# Altium PCB board.PcbDoc
Units mm, origin at the board's own origin, x right, y up, seen from the top; angles counter-clockwise.
Board outline 44.58 x 25.65 mm, 2 copper layers (Top Layer, Bottom Layer); 41 components, 20 nets, 114 pads, 87 vias.
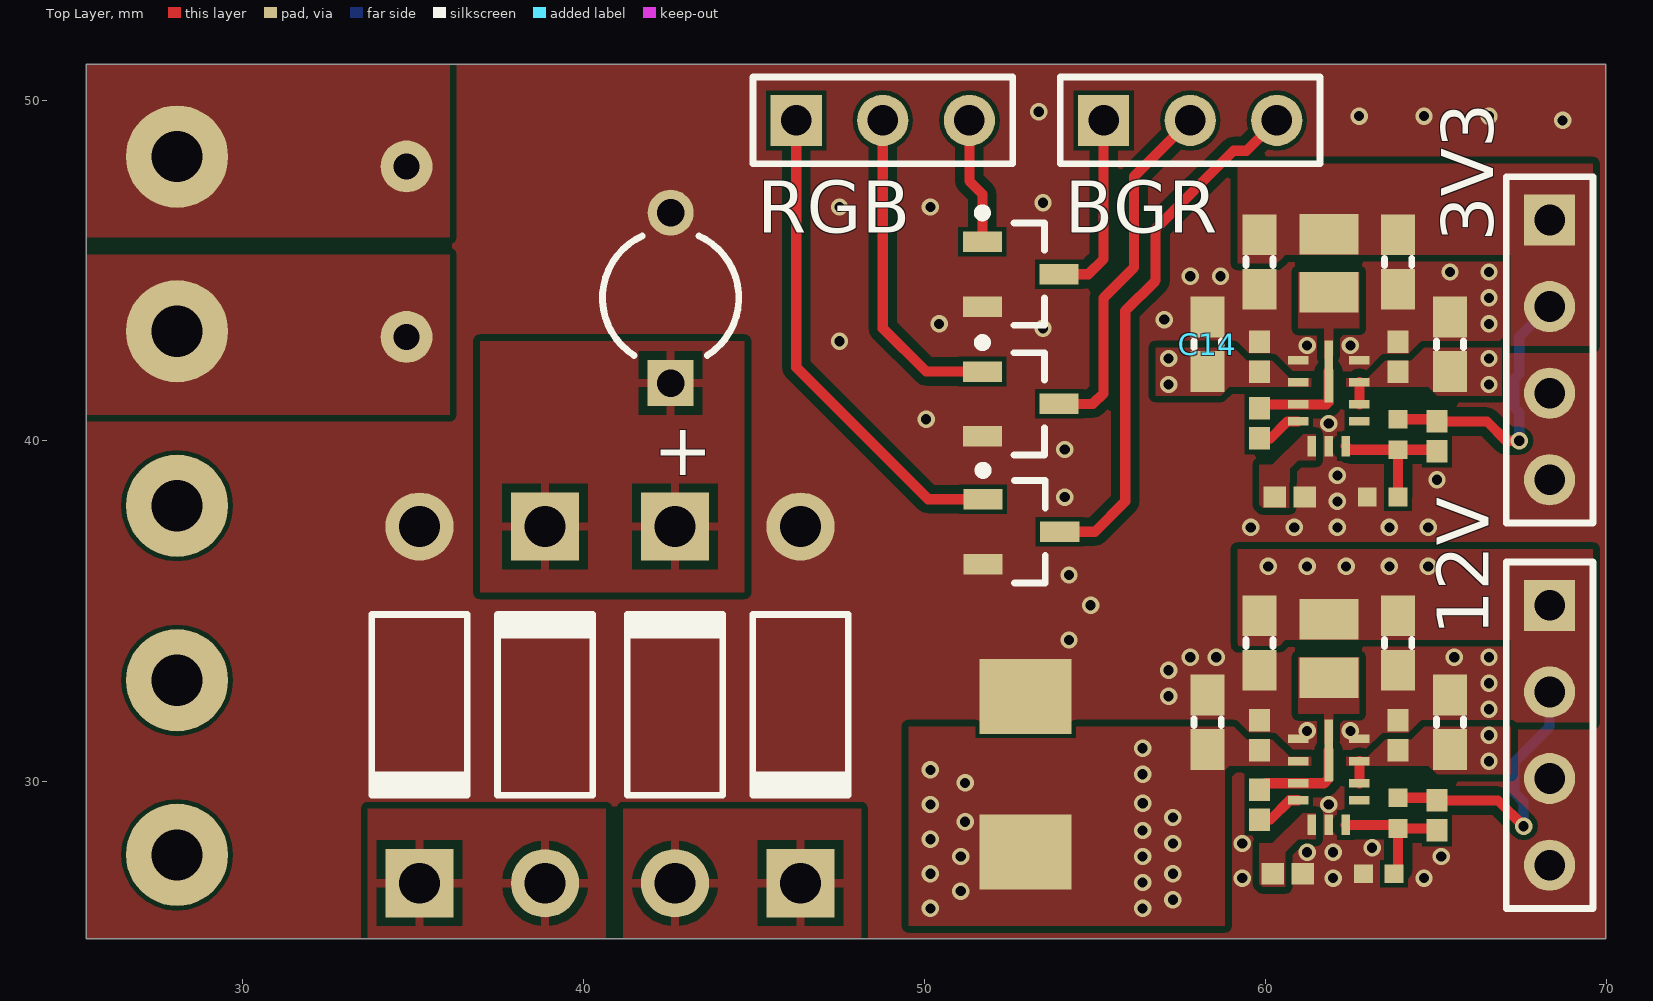
[diagram p0: Top Layer view]
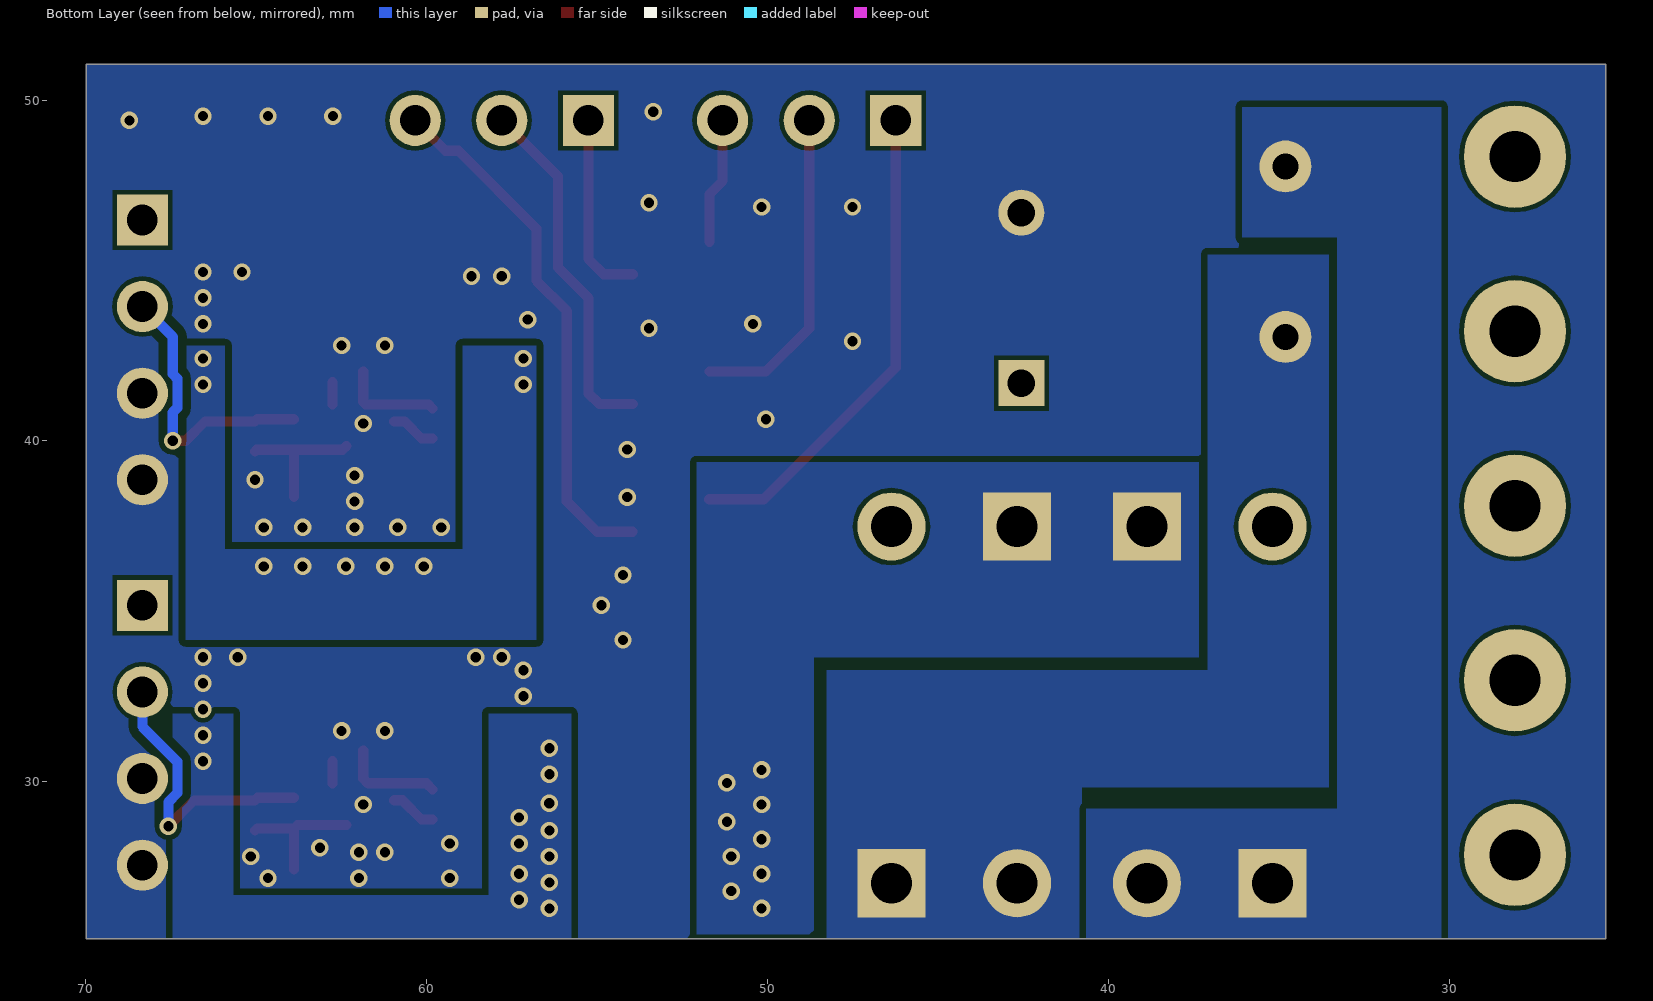
[diagram p1: Bottom Layer view, seen from below]

## Layer stack, top to bottom
Top Solder: solder mask 0.0102, Solder Resist, Dk 3.5
Top Layer: signal copper 0.0356
Dielectric 1: dielectric 0.32, FR-4, Dk 4.8
Bottom Layer: signal copper 0.0356
Bottom Solder: solder mask 0.0102, Solder Resist, Dk 3.5

## Board outline
25.4,25.4 69.977,25.4 69.977,51.054 25.4,51.054

## Design rules (kind name [scope] priority, off if disabled: settings)
Clearance Clearance_1 [(InDifferentialPairClass('All Differential Pairs'))] p1: gap=0.127 ignorepadtopadclearanceinfootprint=FALSE except(0: Arc-Hole Track-Hole SMDPad-Hole THPad-Hole Via-Hole Fill-Hole Poly-Hole Region-Hole Text-Hole; 0.3: Poly-Poly; 0.4: Arc-Track Arc-Poly Track-Poly)
Clearance [All] p2: gap=0.127 ignorepadtopadclearanceinfootprint=FALSE except(0: Arc-Hole Track-Hole SMDPad-Hole THPad-Hole Via-Hole Fill-Hole Poly-Hole Region-Hole Text-Hole; 0.2: Poly-Poly; 0.254: Track-Poly)
DiffPairsRouting [InDifferentialPair('RF')] p1: maxlimit=0.254 minlimit=0.127 mostfreqgap=0.152 toplayer_minwidth=0.127 toplayer_maxwidth=0.381 toplayer_prefwidth=0.127 bottomlayer_minwidth=0.127 bottomlayer_maxwidth=0.381 bottomlayer_prefwidth=0.127 maxuncoupledlength=12.7
DiffPairsRouting USBDiff [All] p2: maxlimit=0.152 minlimit=0.152 mostfreqgap=0.152 toplayer_minwidth=0.216 toplayer_maxwidth=0.216 toplayer_prefwidth=0.216 bottomlayer_minwidth=0.216 bottomlayer_maxwidth=0.216 bottomlayer_prefwidth=0.216 maxuncoupledlength=12.7
PolygonConnect PolygonConnect_11 [All vs IsNamedPolygon('Bottom Layer-VDDAC 1')] p1: connectstyle=Direct reliefconductorwidth=0.254 reliefentries=4 polygonreliefangle="90 Angle" airgapwidth=0.254
PolygonConnect PolygonConnect_10 [All vs IsNamedPolygon('Top Layer-GND2')] p2: connectstyle=Direct reliefconductorwidth=0.254 reliefentries=4 polygonreliefangle="90 Angle" airgapwidth=0.254
PolygonConnect PolygonConnect_9 [All vs IsNamedPolygon('Bottom Layer-VDDAC')] p3: connectstyle=Direct reliefconductorwidth=0.254 reliefentries=4 polygonreliefangle="90 Angle" airgapwidth=0.254
PolygonConnect PolygonConnect_8 [All vs IsNamedPolygon('Top Layer-NetCB1_1 1')] p4: connectstyle=Direct reliefconductorwidth=0.254 reliefentries=4 polygonreliefangle="90 Angle" airgapwidth=0.254
PolygonConnect PolygonConnect_7 [All vs IsNamedPolygon('Top Layer-NetCB1_2 1')] p5: connectstyle=Direct reliefconductorwidth=0.254 reliefentries=4 polygonreliefangle="90 Angle" airgapwidth=0.254
PolygonConnect PolygonConnect_6 [All vs IsNamedPolygon('Top Layer-NetCB1_1 1')] p6: connectstyle=Direct reliefconductorwidth=0.254 reliefentries=4 polygonreliefangle="90 Angle" airgapwidth=0.254
PolygonConnect PolygonConnect_5 [All vs IsNamedPolygon('Bottom Layer-VDD_12V')] p7: connectstyle=Direct reliefconductorwidth=0.254 reliefentries=4 polygonreliefangle="90 Angle" airgapwidth=0.254
PolygonConnect PolygonConnect_4 [All vs IsNamedPolygon('Top Layer-NetC2_1')] p8: connectstyle=Direct reliefconductorwidth=0.254 reliefentries=4 polygonreliefangle="90 Angle" airgapwidth=0.254
PolygonConnect PolygonConnect_3 [All vs IsNamedPolygon('Top Layer-NetC10_2')] p9: connectstyle=Direct reliefconductorwidth=0.254 reliefentries=4 polygonreliefangle="90 Angle" airgapwidth=0.254
PolygonConnect PolygonConnect_2 [All vs IsNamedPolygon('Top Layer-VDD_12V')] p10: connectstyle=Direct reliefconductorwidth=0.254 reliefentries=4 polygonreliefangle="90 Angle" airgapwidth=0.254
PolygonConnect PolygonConnect_1 [All vs IsNamedPolygon('Top Layer-VDDAC')] p11: connectstyle=Direct reliefconductorwidth=0.254 reliefentries=4 polygonreliefangle="90 Angle" airgapwidth=0.254
PolygonConnect [All] p12: connectstyle=Relief reliefconductorwidth=0.254 reliefentries=4 polygonreliefangle="90 Angle" airgapwidth=0.254
RoutingVias [All] p1: holewidth=0.3 width=0.51 viastyle="Through Hole" minholewidth=0.254 minwidth=0.457 maxholewidth=0.711 maxwidth=0.914
SolderMaskExpansion [All] p1: expansion=0.102
Width [All] p1: maxlimit=5 minlimit=0.127 preferedwidth=0.2
29 further rules are at their usual default settings.

## Classes and differential pairs
component class schematic: 3V3 12V BGR RGB ""

## Components (designator, comment, footprint, x,y, rotation, side; value= is the part's Value field where it differs from the comment)
3V3 "Header 4" HDR1X4 68.326,46.482 r270 top (schematic designator P5)
12V "Header 4" HDR1X4 68.326,35.179 r270 top (schematic designator P4)
+ "Cap2" CAPR5-4X5 42.545,44.196 r90 top value=100uF (schematic designator C1)
BGR "Header 3" HDR1X3 55.245,49.403 r0 top (schematic designator P1)
C2 "" C_0402 59.817,29.337 r270 top value=0.1uF
C3 "" CAPC1608X05N 65.405,31.75 r270 top value=10uF
C4 "" C_0402 59.817,31.369 r270 top value=220nF
C5 "" CAPC1608X05N 58.293,31.75 r270 top value=10uF
C6 "" C_0402 63.881,31.369 r270 top value=220nF
C7 "" C_0402 65.024,29.015 r90 top value=0.1uF
C8 "" CAPC1608X05N 63.881,34.074 r90 top value=22uF
C9 "" CAPC1608X05N 59.817,34.074 r90 top value=22uF
C10 "" C_0402 60.647,27.305 r180 top value=1uF
C11 "" C_0402 59.817,40.513 r270 top value=0.1uF
C12 "" CAPC1608X05N 65.405,42.837 r270 top value=10uF
C13 "" C_0402 63.881,42.477 r270 top value=220nF
C14 "" CAPC1608X05N 58.293,42.837 r270 top value=10uF
C15 "" C_0402 59.817,42.477 r270 top value=220nF
C16 "" C_0402 65.024,40.132 r90 top value=0.1uF
C17 "" CAPC1608X05N 63.881,45.25 r90 top value=22uF
C18 "" CAPC1608X05N 59.817,45.25 r90 top value=22uF
C19 "" C_0402 60.706,38.354 r180 top value=1uF
CB1 "MOV place holder" mov 34.925,45.339 r90 top
D1 "Diode 1N4007" DO-41 35.179,32.258 r270 top
D2 "Diode 1N4007" DO-41 38.862,32.258 r90 top
D3 "D Zener" DIODE 52.959,30.48 r180 top
D4 "Diode 1N4007" DO-41 46.355,32.258 r270 top
D5 "Diode 1N4007" DO-41 42.672,32.258 r90 top
L1 "Inductor" INDC2016X10N 61.849,33.913 r90 top value="1.5 uH"
L2 "Inductor" INDC2016X10N 61.849,45.212 r90 top value="1.5 uH"
P3 "Header 5" edge 28.448,27.606 r90 top
Q1 "QNPN" SOT-23B_N 52.814,44.892 r0 top
Q2 "QNPN" SOT-23B_N 52.814,41.087 r0 top
Q3 "QNPN" SOT-23B_N 52.832,37.338 r0 top
R1 "Res1" R_0402 63.881,29.083 r270 top
R2 "Res1" R_0402 63.315,27.305 r180 top
R3 "Res1" R_0402 63.881,40.19 r270 top
R4 "Res1" R_0402 63.431,38.354 r180 top
RGB "Header 3" HDR1X3 46.228,49.403 r0 top (schematic designator P2)
U1 "LMR33620ARNXR" RNX0012B 61.849,30.137 r0 top value=Value
U2 "LMR33620ARNXR" RNX0012B 61.849,41.249 r0 top value=Value

## Footprints (in the part's own frame and the unit in brackets; to place one, negate y for a bottom-side part, rotate by r counter-clockwise, add the part's x,y. Pads: shape width x height; smd on the part's side, far side on the other; paste and mask are expansions set on the pad)
C_0402 [mm] "Chip Capacitor, 2-Leads, Body 1,00x0,50mm, IPC Medium Density"
  rect 0.66x0.62 smd: 1(-0.44,0) 2(0.44,0)
  body extent -0.53,-0.28 0.53,0.28, height 0.55
CAPC1608X05N [mm] "Chip Capacitor, 2-Leads, Body 1,60x0,80mm, IPC Medium Density"
  rect 1.2x1 smd: 1(-0.8,0) 2(0.8,0)
  silkscreen extent -0.1,-0.4 0.1,0.4, body extent -0.85,-0.45 0.85,0.45, height 0.5
CAPR5-4X5 [mm] "Capacitor; 2 Leads"
  rect 1.35x1.35 hole 0.8: 1(-2.5,0)
  round 1.35 hole 0.8: 2(2.5,0)
  silkscreen extent -1.69,-2 1.82,2
DIODE [mm]
  rect 2.7x2.2 smd: 1(0,-2.032) 2(0,2.54)
DO-41 [mm] "Diode, Axial; Body 5.2 x 2.7 mm (LxDia. max), Lead Dia. 0.86 mm (max)"
  round 2 hole 1.2: 1(-5.23,0)
  rect 2x2 hole 1.2: 2(5.23,0)
  silkscreen extent -2.65,-1.4 2.75,1.4
edge [mm]
  round 3 hole 1.5: 1(0.254,0.381) 2(5.374,0.381) 3(10.494,0.381) 4(15.614,0.381) 5(20.734,0.381)
HDR1X3 [mm] "Connector; Header; 3 Position"
  rect 1.5x1.5 hole 0.9: 1(0,0)
  round 1.5 hole 0.9: 2(2.54,0) 3(5.08,0)
  silkscreen extent -1.27,-1.27 6.35,1.27
HDR1X4 [mm] "Connector; Header; 4 Position"
  rect 1.5x1.5 hole 0.9: 1(0,0)
  round 1.5 hole 0.9: 2(2.54,0) 3(5.08,0) 4(7.62,0)
  silkscreen extent -1.27,-1.27 8.89,1.27
INDC2016X10N [mm] "Chip Inductor, 2-Leads, Body 2,00x1,60mm, IPC Medium Density"
  rect 1.19x1.73 smd: 1(-0.855,0) 2(0.855,0)
  body extent -1.1,-0.81 1.1,0.81, height 1
mov [mil]
  round 60 hole 30: 1(-90,5) 2(106.85,5)
R_0402 [mm] "Chip Resistor, 2-Leads, Body 1,00x0,50mm, IPC Medium Density"
  rect 0.55x0.55 smd: 1(-0.45,0) 2(0.45,0)
  body extent -0.53,-0.28 0.53,0.28, height 0.4
RNX0012B [mm]
  rect 0.6x0.25 smd paste+0 mask+0: 1(-0.9,1.125) 2(-0.9,0.475) 3(-0.9,-0.175) 4(-0.9,-0.675) 8(0.9,-0.675) 9(0.9,-0.175) 10(0.9,0.475) 11(0.9,1.125)
  rect 0.25x0.6 smd paste+0 mask+0: 5(-0.5,-1.4) 6(0,-1.4) 7(0.5,-1.4)
  rect 0.25x1.825 smd paste-0.9 mask+0: 12(0,0.788)
  body extent -1.02,-1.52 0.98,1.48, height 0.91
SOT-23B_N [mm] "SOT23, 3-Leads, Body 2.9x1.3mm, Pitch 0.95mm, Lead Span 2.4mm, IPC Medium Density"
  rect 1.15x0.6 smd: 1(-1.125,0.95) 2(-1.125,-0.95) 3(1.125,0)
  silkscreen extent -1.25,-1.5 0.7,1.92, body extent -0.7,-1.5 0.7,1.5, height 1.14

## Part data
3V3 12V: "Header, 4-Pin", LatestRevisionDate=17-Jul-2002, LatestRevisionNote="Re-released for DXP Platform.", Publisher="Altium Limited"
+: "Capacitor", PackageDescription="Capacitor; 2 Leads", PackageReference=CAPR5-4X5, Published=23-Sep-2002, Publisher="Altium Limited"
BGR RGB: "Header, 3-Pin", LatestRevisionDate=17-Jul-2002, LatestRevisionNote="Re-released for DXP Platform.", Publisher="Altium Limited"
C2 C3 C4 C5 C6 C7 C8 C9 C10 C11 C12 C13 C14 C15 C16 C17 C18 C19: library part Cap
CB1: library part "Circuit Breaker", "Circuit Breaker", LatestRevisionDate=17-Jul-2002, LatestRevisionNote="Re-released for DXP Platform.", PackageDescription="Switch; 2 Leads", PackageReference=SPST-2, Published=24-Mar-1999, Publisher="Altium Limited"
D1 D2 D4 D5: "1 Amp General Purpose Rectifier", Code_JEDEC=DO-204-AL, ComponentLink1Description="Manufacturer Link", ComponentLink1URL=http://www.fairchildsemi.com/, ComponentLink2Description=Datasheet, ComponentLink2URL=http://www.fairchildsemi.com/ds/1N%2F1N4001.pdf, DatasheetVersion=1998, LatestRevisionDate=17-Jul-2002, LatestRevisionNote="Re-released for DXP Platform.", PackageDescription="Diode, Axial; Body 5.2 x 2.7 mm (LxDia. max), Lead Dia. 0.86 mm (max)", PackageReference=DO-41, PackageVersion=Aug-1999, Published=8-Jun-2000, Publisher="Altium Limited"
D3: "Zener Diode", LatestRevisionDate=17-Jul-2002, LatestRevisionNote="Re-released for DXP Platform.", PackageDescription="Diode, Thru-Hole; 2 Leads; 0.7 in Pin Spacing", PackageReference=DIODE-0.7, Published=8-Jun-2000, Publisher="Altium Limited"
P3: "Header, 5-Pin", LatestRevisionDate=17-Jul-2002, LatestRevisionNote="Re-released for DXP Platform.", Publisher="Altium Limited"
Q1 Q2 Q3: "NPN Bipolar Transistor", LatestRevisionDate=29-May-2009, LatestRevisionNote="IPC-7351 Footprint Added.", PackageDescription="3-Pin SOT-23 Package 0.95 mm Pitch, 2.4 mm Lead Span", PackageReference=SOT-23B, PackageVersion=Aug-1999, Published=8-Jun-2000, Publisher="Altium Limited"
R1 R2 R3 R4: "Resistor"
  R1 R3: =100k
  R2: =9.09k
  R4: =43.2k
U1 U2: "Imported", Manufacturer="Texas Instruments", PartNumber=LMR33620ARNXR, RefDes=RefDes, TYPE=TYPE
L1 L2: Code_IEC=1005, Code_JEITA=0402, LatestRevisionDate=29-May-2009, LatestRevisionNote="IPC-7351 Footprint Added.", PackageDescription="Chip Inductor", PackageReference=0402-A, Published=8-Jun-2000, Publisher="Altium Limited"

## Via types
v1: diameter 0.51, hole 0.3, Top Layer to Bottom Layer, tented both sides, 87 vias

## Nets (pads, with @x,y where several pads share a name; then routed paths per layer and width w, separated by ;. In a path a pad name is that pad's centre, name@x,y a point inside that pad or via, vN(x,y) a via of type N, cw(c..) or ccw(c..) an arc to the next point about the centre after c; other vN are vias at no path point)
GND2: 3V3.3 3V3.4 12V.3 12V.4 +.2 C3.1 C4.1 C5.1 C6.1 C8.1 C9.1 C10.1 C12.1 C13.1 C14.1 C15.1 C17.1 C18.1 C19.1 D1.1 D3.1 D4.1 Q1.2 Q2.2 Q3.2 R2.2 R4.2 U1.1 U1.6 U1.11 U2.1 U2.6 U2.11
  other v1: 59.309,27.178 61.976,27.178 64.643,27.178 65.151,27.813 61.214,27.94 61.976,27.94 63.119,28.067 59.309,28.194 61.849,29.337 61.214,31.496 62.484,31.496 66.548,32.131 57.15,32.512 66.548,32.893 57.15,33.274 57.785,33.655 58.547,33.655 65.532,33.655 66.548,33.655 54.229,34.163 54.864,35.179 54.229,36.068 59.563,37.465 60.833,37.465 62.103,37.465 63.627,37.465 64.77,37.465 62.103,38.227 54.102,38.354 65.024,38.862 62.103,38.989 54.102,39.751 61.849,40.513 50.038,40.64 61.214,42.799 62.484,42.799 47.498,42.926 53.467,43.307 50.419,43.434 66.548,43.434 57.023,43.561 66.548,44.196 57.785,44.831 58.674,44.831 65.405,44.958 66.548,44.958 47.498,46.863 50.165,46.863 53.467,46.99 68.707,49.403 62.738,49.53 64.643,49.53 66.548,49.53 53.34,49.657
NetC2_1: C2.1 L1.1 U1.3 U1.12 | length 3
  Top Layer w0.3: C2.1 60.002,29.962 U1.3 61.712,29.962 61.849,30.099 U1.12
NetC2_2: C2.2 U1.4 | length 1.4
  Top Layer w0.3: C2.2 60.139,28.897 60.704,29.462 U1.4
NetC7_1: C7.1 R1.2 R2.1 U1.7 | length 3.9
  Top Layer w0.3: U1.7 63.777,28.737 R1.2 ; R2.1@63.881,27.432 R1.2 ; C7.1 64.966,28.633 R1.2
NetC10_2: C10.2 U1.5
NetC11_1: C11.1 L2.1 U2.3 U2.12 | length 3
  Top Layer w0.3: C11.1 59.938,41.074 U2.3 61.775,41.074 61.849,41.148 U2.12
NetC11_2: C11.2 U2.4 | length 1.3
  Top Layer w0.3: C11.2 60.139,40.073 60.64,40.574 U2.4
NetC16_1: C16.1 R3.2 R4.1 U2.7 | length 4.1
  Top Layer w0.3: U2.7 62.458,39.74 R3.2 ; R4.1 R3.2 ; C16.1 64.976,39.74 R3.2
NetC19_2: C19.2 U2.5
NetCB1_1: CB1.1 D4.2 D5.1 P3.4
NetCB1_2: CB1.2 D1.2 D2.1 P3.5
NetP1_1: BGR.1 Q1.3 | length 5.6
  Top Layer w0.3: Q1.3 54.798,44.892 55.245,45.339 BGR.1
NetP1_2: BGR.2 Q2.3 | length 10.5
  Top Layer w0.3: Q2.3 54.93,41.087 55.245,41.402 55.245,44.196 56.134,45.085 56.134,47.752 BGR.2
NetP1_3: BGR.3 Q3.3 | length 15.5
  Top Layer w0.3: Q3.3 54.991,37.338 55.88,38.227 55.88,43.815 56.769,44.704 56.769,46.228 59.055,48.514 59.436,48.514 BGR.3
NetP2_1: Q3.1 RGB.1 | length 14.3
  Top Layer w0.3: RGB.1 46.228,42.164 50.104,38.288 Q3.1
NetP2_2: Q2.1 RGB.2 | length 9.5
  Top Layer w0.3: RGB.2 48.768,43.307 50.038,42.037 Q2.1
NetP2_3: Q1.1 RGB.3 | length 3.7
  Top Layer w0.3: RGB.3 51.308,47.625 51.689,47.244 Q1.1
VDD_3.3V: 3V3.1 3V3.2 C16.2 C17.2 C18.2 L2.2 R3.1 | length 8.2
  Top Layer w0.3: R3.1 64.956,40.64 C16.2 66.489,40.572 67.056,40.005 v1(67.437,40.005)
  Bottom Layer w0.3: v1(67.437,40.005) 67.437,40.839 67.299,40.977 67.299,41.827 67.437,41.965 67.437,43.053 3V3.2
VDD_12V: 12V.1 12V.2 C7.2 C8.2 C9.2 C12.2 C13.2 C14.2 C15.2 L1.2 R1.1 U2.2 U2.9 U2.10 | length 9.5
  Top Layer w0.3: U2.9 U2.10 ; R1.1 64.946,29.533 C7.2 66.811,29.455 v1(67.564,28.702)
  Bottom Layer w0.3: v1(67.564,28.702) 67.564,29.409 67.299,29.674 67.299,30.596 68.326,31.623 12V.2 12V.2@68.072,32.385
  other v1: 60.071,36.322 61.214,36.322 62.357,36.322 63.627,36.322 64.77,36.322 57.15,41.656 66.548,41.656 57.15,42.418 66.548,42.418
VDDAC: +.1 C3.2 C4.2 C5.2 C6.2 D2.2 D3.2 D5.2 U1.2 U1.9 U1.10 | length 0.7
  Top Layer w0.3: U1.9 U1.10
  other v1: 50.165,26.289 56.388,26.289 57.277,26.543 51.054,26.797 56.388,27.051 50.165,27.305 57.277,27.305 51.054,27.813 56.388,27.813 57.277,28.194 50.165,28.321 56.388,28.575 51.181,28.829 57.277,28.956 50.165,29.337 56.395,29.374 51.181,29.972 56.388,30.226 50.165,30.353 66.548,30.607 56.388,30.988 66.548,31.369
pads on no net: P3.1 P3.2 P3.3 U1.8 U2.8

## Polygon pours and split planes (outlines as drawn)
GND2 on Top Layer "Top Layer-GND2" (solid, pour order 48): 25.4,51.054 25.4,25.4 69.977,25.4 69.977,51.054
NetC19_2 on Top Layer "Top Layer-NetC10_2" (solid, pour order 28): 59.817,38.036 59.817,39.306 60.198,39.306 61.087,40.195 61.468,40.195 61.468,39.433 60.96,39.433 60.706,39.179 60.706,38.036
VDDAC on Top Layer "Top Layer-VDDAC" (solid, pour order 6): 49.53,31.623 58.801,31.623 58.801,25.781 49.53,25.781
VDD_3.3V on Top Layer "Top Layer-VDD_12V" (solid, pour order 38): 60.452,45.335 60.325,45.208 59.182,45.208 59.182,48.129 69.596,48.129 69.596,42.795 67.183,42.795 67.183,45.462 60.579,45.462
NetCB1_1 on Top Layer "Top Layer-NetCB1_1" (solid, pour order 36): 41.148,25.4 41.148,29.21 48.006,29.21 48.133,29.21 48.133,25.4
NetCB1_2 on Top Layer "Top Layer-NetCB1_2" (solid, pour order 34): 33.655,25.4 33.655,29.21 40.513,29.21 40.64,29.21 40.64,25.4
VDDAC on Top Layer "Top Layer-VDDAC 2" (solid, pour order 14): 36.957,42.926 36.957,35.56 44.704,35.56 44.704,42.926
NetCB1_1 on Top Layer "Top Layer-NetCB1_1 1" (solid, pour order 32): 25.4,45.466 36.068,45.466 36.068,40.767 25.4,40.767
NetCB1_2 on Top Layer "Top Layer-NetCB1_2 1" (solid, pour order 30): 25.4,51.054 36.068,51.054 36.068,45.974 25.4,45.974
VDDAC on Top Layer "Top Layer-VDDAC" (solid, pour order 2): 62.357,30.48 64.77,30.48 65.024,30.226 67.183,30.226 67.183,31.623 64.643,31.623 64.262,31.242 63.5,31.242 62.992,30.734 62.357,30.734
NetC11_1 on Top Layer "Top Layer-NetC2_1" (solid, pour order 26): 60.96,44.954 62.738,44.954 62.738,43.303 61.976,43.303 61.976,42.414 61.722,42.414 61.722,43.303 60.96,43.303
VDD_12V on Top Layer "Top Layer-VDDAC" (solid, pour order 12): 62.357,41.588 64.77,41.588 65.024,41.334 66.929,41.334 66.929,42.731 64.643,42.731 64.262,42.35 63.5,42.35 62.992,41.842 62.357,41.842
VDD_12V on Top Layer "Top Layer-VDDAC" (solid, pour order 10): 61.341,41.588 58.928,41.588 58.674,41.334 56.769,41.334 56.769,42.731 59.055,42.731 59.436,42.35 60.198,42.35 60.706,41.842 61.341,41.842
NetC2_1 on Top Layer "Top Layer-NetC2_1" (solid, pour order 24): 60.96,33.655 62.738,33.655 62.738,32.004 61.976,32.004 61.976,31.115 61.722,31.115 61.722,32.004 60.96,32.004
VDDAC on Top Layer "Top Layer-VDDAC" (solid, pour order 4): 61.341,30.48 58.928,30.48 58.674,30.226 56.769,30.226 56.769,31.623 59.055,31.623 59.436,31.242 60.198,31.242 60.706,30.734 61.341,30.734
NetC10_2 on Top Layer "Top Layer-NetC10_2" (solid, pour order 22): 59.817,26.924 59.817,28.194 60.198,28.194 61.087,29.083 61.468,29.083 61.468,28.321 60.96,28.321 60.579,27.94 60.579,26.924
VDD_12V on Top Layer "Top Layer-VDD_12V" (solid, pour order 20): 60.452,34.036 60.325,33.909 59.182,33.909 59.182,36.83 69.596,36.83 69.596,31.75 67.183,31.75 67.183,34.163 60.579,34.163
GND2 on Bottom Layer "Top Layer-GND2" (solid, pour order 52): 25.4,51.054 25.4,25.4 69.977,25.4 69.977,51.054
VDDAC on Bottom Layer "Bottom Layer-VDDAC 1" (solid, pour order 40): 55.753,25.4 55.753,32.004 58.166,32.004 58.166,26.67 65.659,26.67 65.659,32.004 67.437,32.004 67.437,25.4 58.166,25.4
VDDAC on Bottom Layer "Bottom Layer-VDDAC" (solid, pour order 50): 37.338,39.37 37.338,33.655 48.641,33.655 48.641,25.654 48.768,25.527 52.07,25.527 52.07,39.37
NetCB1_1 on Bottom Layer "Top Layer-NetCB1_1 1" (solid, pour order 46): 33.528,45.466 37.084,45.466 37.084,33.274 48.26,33.274 48.26,25.4 40.767,25.4 40.767,29.845 33.528,29.845
NetCB1_2 on Bottom Layer "Top Layer-NetCB1_2 1" (solid, pour order 44): 36.068,45.974 36.068,49.784 30.226,49.784 30.226,25.4 40.64,25.4 40.64,29.21 33.274,29.21 33.274,45.974
VDD_12V on Bottom Layer "Bottom Layer-VDD_12V" (solid, pour order 42): 56.769,42.799 58.928,42.799 58.928,36.83 65.913,36.83 65.913,42.799 67.056,42.799 67.056,34.163 56.769,34.163

## Silkscreen, mask and mechanical layers (free items; w line width, h text height)
Mechanical 1:
  the board outline again, w0.254